# EAGLE board sensor_vol_div3_eagle (EAGLE 7.5.0)
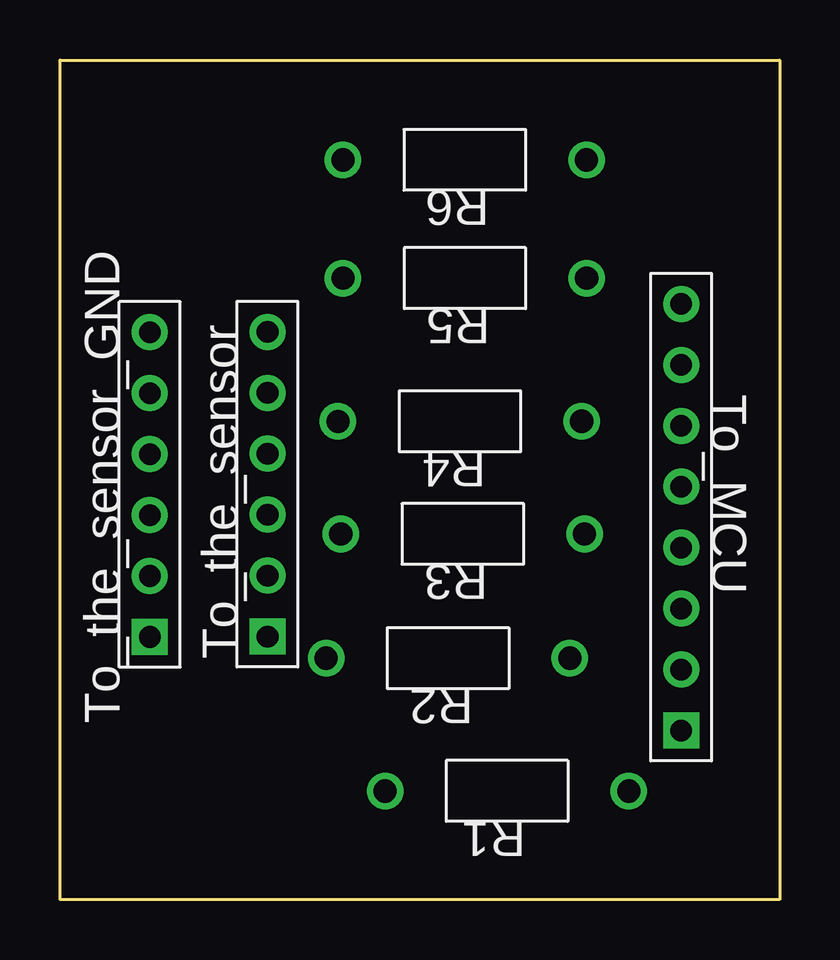
[diagram p0: board, top side]
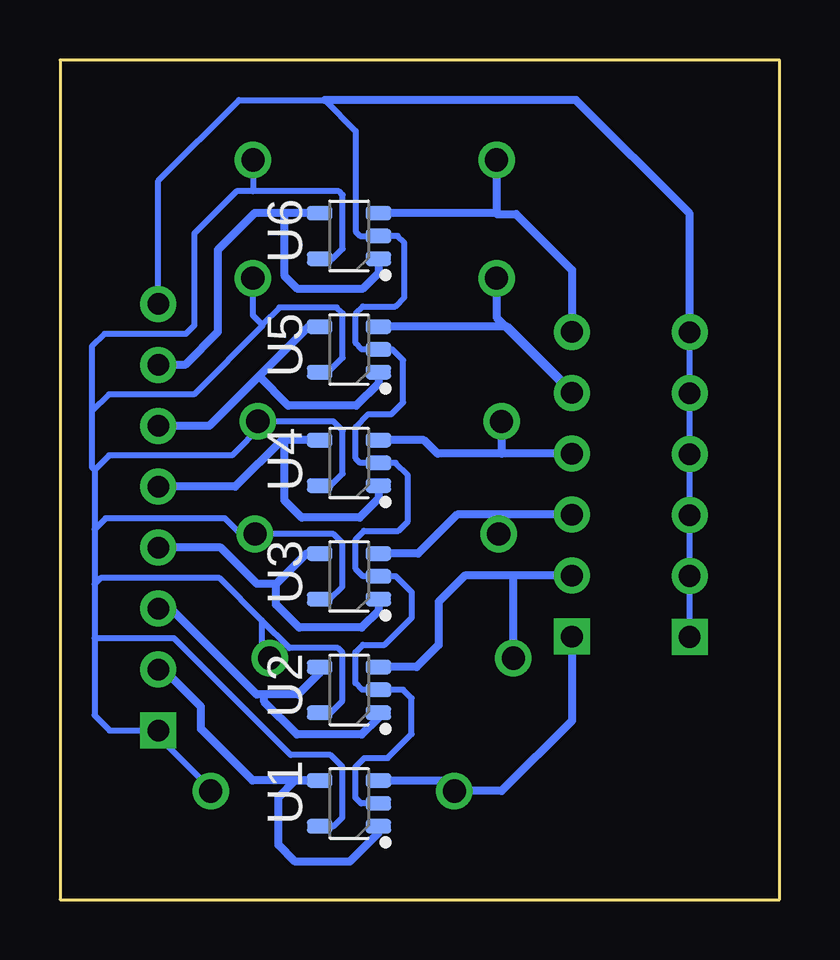
[diagram p1: board, bottom side, seen from below]

Size 30 x 35 mm. Coordinates in mm from the lower left corner, seen from the top.
Outline: 0,35 30,35 30,0 0,0 0,35
Copper layers (1*16): Top 0.035mm / dielectric 1.5mm / Bottom 0.035mm
Design rules "default *": minimum track width 10mil, minimum drill 0.61mm, track to track 8mil, track to pad 8mil, pad to pad 8mil, via to via 8mil, smd to smd 8mil, copper to edge 40mil, drill to drill 8mil, minimum pad ring 0mil, minimum via ring 8mil, stop-mask expansion 2mil, vias tented up to drill 19mil, thermal gap 10mil
Net classes: 0 Default: width 0.33 mm, clearance 0.33 mm

## Footprints (pad centres in the part's own frame; a part is rotated, then mirrored left to right if it is on the bottom)
RES-10.16/5.1x2.5 = drill 0.965 pad 1.524: 1 -5.08,0; 2 5.08,0
HDR-1x8 = drill 0.9 pad 1.5 square: 1 -8.89,0 | drill 0.9 pad 1.5: 2 -6.35,0; 3 -3.81,0; 4 -1.27,0; 5 1.27,0; 6 3.81,0; 7 6.35,0; 8 8.89,0
HDR-1x6 = drill 0.9 pad 1.5 square: 1 -6.35,0 | drill 0.9 pad 1.5: 2 -3.81,0; 3 -1.27,0; 4 1.27,0; 5 3.81,0; 6 6.35,0
SOT23-5P95_280X100L45X40N = smd 0.61 x 1.07: 1 -0.95,-1.225; 2 0,-1.225; 3 0.95,-1.225; 4 0.95,1.225; 5 -0.95,1.225

## Placement (x,y rotation side)
R1  5.6MOhm  [RES-10.16/5.1x2.5]  18.64,4.52 180 top
R2  5.6MOhm  [RES-10.16/5.1x2.5]  16.18,10.06 180 top
R3  5.6MOhm  [RES-10.16/5.1x2.5]  16.79,15.24 180 top
R4  5.6MOhm  [RES-10.16/5.1x2.5]  16.67,19.93 180 top
R5  5.6MOhm  [RES-10.16/5.1x2.5]  16.88,25.9 180 top
R6  5.6MOhm  [RES-10.16/5.1x2.5]  16.88,30.83 180 top
To_MCU  HDR-1X8  [HDR-1x8]  25.9,15.94 90 top
To_the_sensor  HDR-1X6  [HDR-1x6]  8.66,17.31 90 top
To_the_sensor_GND  HDR-1X6  [HDR-1x6]  3.75,17.3 90 top
U1  AD8615AUJZ-REEL  [SOT23-5P95_280X100L45X40N]  17.95,4.01 90 bottom
U2  AD8615AUJZ-REEL  [SOT23-5P95_280X100L45X40N]  17.95,8.74 90 bottom
U3  AD8615AUJZ-REEL  [SOT23-5P95_280X100L45X40N]  17.95,13.47 90 bottom
U4  AD8615AUJZ-REEL  [SOT23-5P95_280X100L45X40N]  17.95,18.2 90 bottom
U5  AD8615AUJZ-REEL  [SOT23-5P95_280X100L45X40N]  17.94,22.93 90 bottom
U6  AD8615AUJZ-REEL  [SOT23-5P95_280X100L45X40N]  17.94,27.66 90 bottom

## Library data of the parts
R1-R6 = common; UNIQUE_NAME: RES-10.16/5.1x2.5
To_MCU = common; UNIQUE_NAME: HDR-1x8
To_the_sensor To_the_sensor_GND = common; UNIQUE_NAME: HDR-1x6
U1-U6 = common; DATASHEET: http://datasheets.diptrace.com/analog_devices/AD8615_8616_8618.pdf; MANUFACTURER: Analog Devices; PART_NUMBER_(DIGI-KEY): AD8615AUJZ-REELDKR-ND; UNIQUE_NAME: ANALOG_UJ-5

## Nets
Net_2: R1.1 R2.1 R3.1 R4.1 R5.1 R6.1 To_MCU.1 U1.5 U2.5 U3.5 U4.5 U5.5 U6.5
Net_3: To_MCU.8 To_the_sensor_GND.1 To_the_sensor_GND.2 To_the_sensor_GND.3 To_the_sensor_GND.4 To_the_sensor_GND.5 To_the_sensor_GND.6 U1.2 U2.2 U3.2 U4.2 U5.2 U6.2
OUT_Op_Amp1: To_MCU.2 U1.1 U1.4
OUT_Op_Amp2: To_MCU.3 U2.1 U2.4
OUT_Op_Amp3: To_MCU.4 U3.1 U3.4
OUT_Op_Amp4: To_MCU.5 U4.1 U4.4
OUT_Op_Amp5: To_MCU.6 U5.1 U5.4
OUT_Op_Amp6: To_MCU.7 U6.1 U6.4
SENSE_IN1: R1.2 To_the_sensor.1 U1.3
SENSE_IN2: R2.2 To_the_sensor.2 U2.3
SENSE_IN3: R3.2 To_the_sensor.3 U3.3
SENSE_IN4: R4.2 To_the_sensor.4 U4.3
SENSE_IN5: R5.2 To_the_sensor.5 U5.3
SENSE_IN6: R6.2 To_the_sensor.6 U6.3

## Tracks (layer width: path | path; a pad name or v marks a point on that pad's centre or on a via)
Net_2
  Bottom 0.25: U1.5 18.59,3.06 18.22,3.43 18.22,5.53 18.72,6.03 20.38,6.03 25.25,10.89 28.56,10.89 | 28.56,10.89 28.56,7.68 27.93,7.05 To_MCU.1 25.9,6.79 23.72,4.61 R1.1 | U2.5 18.71,7.79 18.22,8.28 18.22,10.29 18.41,10.48 20.43,10.48 21.59,11.64 | 21.59,11.64 23.35,13.4 28.31,13.4 28.56,13.15 | 28.56,13.15 28.56,10.89 | U3.5 18.73,12.52 18.22,13.04 18.22,14.86 18.59,15.23 R3.1 | R3.1 22.46,15.23 23.12,15.89 28.1,15.89 28.56,15.43 | 28.56,15.43 28.56,13.15 | U4.5 18.72,17.25 18.22,17.75 18.22,19.55 18.6,19.93 21.42,19.93 21.54,19.8 | 21.54,19.8 22.83,18.52 27.96,18.52 28.56,17.92 | 28.56,17.92 28.56,15.43 | U5.5 18.82,21.98 18.22,22.59 18.22,24.44 18.47,24.69 20.85,24.69 21.57,23.97 | 21.57,23.97 21.57,23.91 24.42,21.06 27.97,21.06 28.67,20.36 | 28.67,20.36 28.67,18.02 28.56,17.92 | U6.5 18.64,26.71 18.22,27.13 18.22,29.37 18.37,29.53 21.95,29.53 | 21.95,29.53 22.64,29.53 24.4,27.76 24.4,23.93 24.75,23.58 28.16,23.58 28.67,23.07 28.67,20.36 | R6.1 21.95,29.53 | R5.1 21.96,24.36 21.57,23.97 | R4.1 21.75,19.8 21.54,19.8 | R3.1 | 21.59,11.64 21.59,10.39 R2.1
Net_3
  Bottom 0.25: U1.2 17.44,4.01 17.68,4.25 17.68,5.53 17.31,5.9 16.34,5.9 15.34,6.9 15.34,8.39 15.69,8.74 U2.2 17.4,8.74 17.68,9.02 17.68,10.31 17.37,10.62 16.47,10.62 15.33,11.75 15.33,12.8 16,13.47 U3.2 17.36,13.47 17.67,13.78 17.67,15.02 17.32,15.36 15.89,15.36 15.49,15.77 15.49,17.69 16.01,18.2 U4.2 17.49,18.2 17.68,18.39 17.68,19.71 17.15,20.23 16.19,20.23 15.69,20.73 15.69,22.48 16.14,22.93 U5.2 17.42,22.93 17.68,23.19 17.68,24.42 17.37,24.73 16.02,24.73 15.64,25.11 15.64,27.38 15.93,27.66 U6.2 17.49,27.66 17.67,27.85 17.67,32.04 18.96,33.32 22.54,33.32 25.9,29.96 To_MCU.8 | To_the_sensor_GND.1 To_the_sensor_GND.2 | To_the_sensor_GND.2 | To_the_sensor_GND.2 To_the_sensor_GND.3 | To_the_sensor_GND.3 | To_the_sensor_GND.3 To_the_sensor_GND.4 | To_the_sensor_GND.4 | To_the_sensor_GND.4 To_the_sensor_GND.5 | To_the_sensor_GND.5 | To_the_sensor_GND.5 To_the_sensor_GND.6 | To_the_sensor_GND.6
  Bottom 0.33: To_the_sensor_GND.6 3.75,28.59 8.48,33.32 18.96,33.32
OUT_Op_Amp1
  Bottom 0.33: To_MCU.2 25.67,9.59 24.12,8.04 24.12,7.11 21.97,4.96 U1.4 20.19,4.96 20.89,4.26 20.89,2.28 20.19,1.58 17.92,1.58 16.72,2.78 U1.1
OUT_Op_Amp2
  Bottom 0.33: U2.4 19.17,9.44 20.07,8.55 21.49,8.55 | 21.49,8.55 21.8,8.55 25.39,12.13 To_MCU.3 | U2.1 16.72,7.58 17.42,6.88 20.12,6.88 21.49,8.25 21.49,8.55
OUT_Op_Amp3
  Bottom 0.33: U3.4 19.73,14.42 20.99,13.16 | 20.99,13.16 21.79,13.16 23.3,14.67 To_MCU.4 | U3.1 16.72,12.04 17.42,11.34 20.03,11.34 20.99,12.3 20.99,13.16
OUT_Op_Amp4
  Bottom 0.33: U4.4 20.65,19.15 | 20.65,19.15 20.75,19.15 22.69,17.21 To_MCU.5 | U4.1 16.72,16.71 17.51,15.92 19.92,15.92 20.65,16.64 20.65,19.15
OUT_Op_Amp5
  Bottom 0.33: U5.4 19.64,23.88 21.71,21.82 | 21.71,21.82 23.77,19.75 To_MCU.6 | U5.1 16.72,21.52 17.65,20.59 20.48,20.59 21.71,21.82
OUT_Op_Amp6
  Bottom 0.33: U6.4 20.63,28.62 | 20.63,28.62 21.88,28.62 23.42,27.08 23.42,23.66 24.79,22.29 To_MCU.7 | U6.1 16.72,26.12 17.39,25.45 20.09,25.45 20.63,25.99 20.63,28.62
SENSE_IN1
  Bottom 0.33: To_the_sensor.1 8.66,7.46 11.59,4.52 R1.2 13.99,4.96 U1.3
SENSE_IN2
  Bottom 0.33: To_the_sensor.2 11.1,13.5 | 11.1,13.5 13.12,13.5 14.22,12.41 14.22,10.61 15.13,9.69 U2.3 | R2.2 11.1,13.5
SENSE_IN3
  Bottom 0.33: To_the_sensor.3 11.75,16.04 | 11.75,16.04 13.44,16.04 15.06,14.42 U3.3 | R3.2 11.71,16 11.75,16.04
SENSE_IN4
  Bottom 0.33: To_the_sensor.4 11.59,18.58 | 11.59,18.58 14.26,18.58 14.83,19.15 U4.3 | R4.2 11.59,18.58
SENSE_IN5
  Bottom 0.33: U5.3 11.35,23.88 8.66,21.19 To_the_sensor.5 11.8,24.27 R5.2
SENSE_IN6
  Bottom 0.33: R6.2 11.8,28.58 | 11.8,28.58 10.99,28.58 8.66,26.25 To_the_sensor.6 | 11.8,28.58 11.83,28.62 U6.3

## Text on the board
tPlace: R6 | R5 | To_MCU | R4 | R3 | To_the_sensor | R2 | To_the_sensor_GND | R1
bPlace: U6 | U5 | U4 | U3 | U2 | U1